# Altium PCB DE-211024.PcbDoc (part 2 of 2)
Units mil, origin at the board's own origin, x right, y up, seen from the top; angles counter-clockwise.
Board outline 2677.17 x 5821 mil, 2 copper layers (Top Layer, Bottom Layer); 98 components, 134 nets, 413 pads, 37 vias.
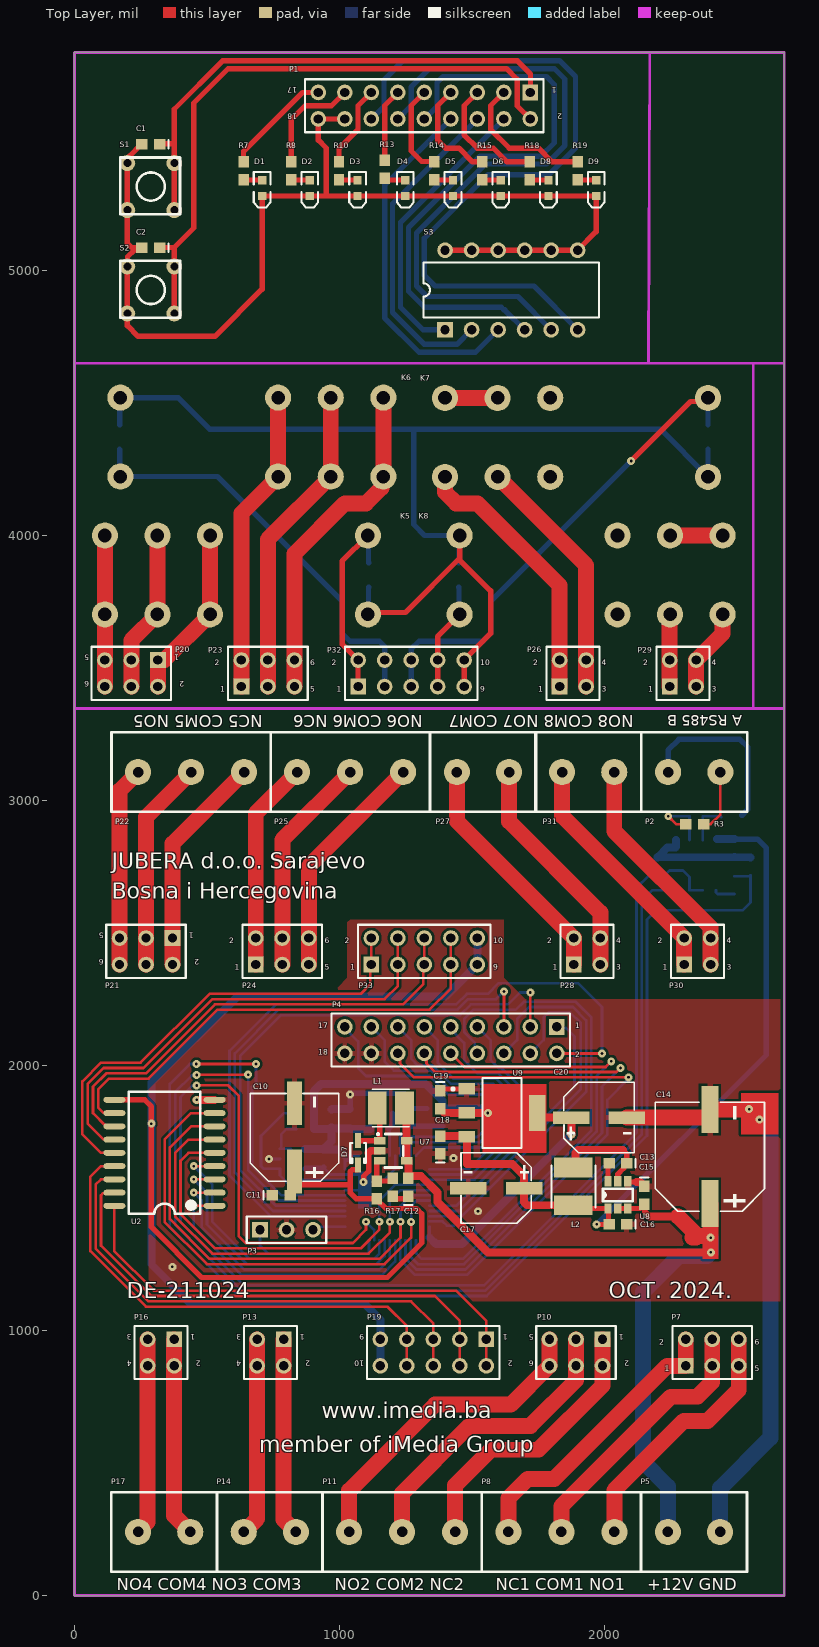
[diagram p0: Top Layer view]

## Via types
v1: diameter 30, hole 10, Top Layer to Bottom Layer, 37 vias

## Nets (pads, with @x,y where several pads share a name; then routed paths per layer and width w, separated by ;. In a path a pad name is that pad's centre, name@x,y a point inside that pad or via, vN(x,y) a via of type N, cw(c..) or ccw(c..) an arc to the next point about the centre after c; other vN are vias at no path point) (continued)
RELAY4: (continued)
  Bottom Layer w10: v1(450,1620) 520,1550 520,1410 660,1270 1130,1270 1150,1290 1150,1309.27 1150.13,1309.4 1150.13,1339.87 1150,1340 1150.47,1340.47 U1.32
RELAY5: U1.16 U2.5 | length 1497.9
  Top Layer w10: U2.5 430,1670 400,1640 400,1440 530,1310 1080,1310 1150,1380 v1(1150,1410)
  Bottom Layer w10: v1(1150,1410) 1150,1490 1209.21,1549.21 U1.16
RELAY6: U1.17 U2.6 | length 1596.3
  Top Layer w10: U2.6 430,1720 380,1670 380,1430 520,1290 1110,1290 1190,1370 v1(1190,1410)
  Bottom Layer w10: v1(1190,1410) 1190,1490 1229.53,1529.53 U1.17
RELAY7: U1.18 U2.7 | length 1683
  Top Layer w10: U2.7 440,1770 360,1690 360,1420 510,1270 1150,1270 1230,1350 v1(1230,1410)
  Bottom Layer w10: v1(1230,1410) 1230,1470 1269.84,1509.84 U1.18
RELAY8: U1.19 U2.8 | length 1775.9
  Top Layer w10: U2.8 440,1820 340,1720 340,1410 500,1250 1170,1250 1270,1350 1270,1409.46 v1(1270.35,1409.81)
  Bottom Layer w10: v1(1270.35,1409.81) 1270,1410.17 1270,1470 1290.16,1490.16 U1.19
SWCLK: P3.3 U1.37 | length 120.6
  Bottom Layer w10: P3.3@900,1391.73 U1.37
SWDIO: P3.1 U1.34 | length 530.5
  Bottom Layer w10: P3.1 700,1320 730,1290 1105,1290 1111.1,1296.1 U1.34
USART1_DE: R2.2 U1.33 U4.2 U4.3 | length 5197.3
  Top Layer w10: v1(461.21,1923.79) 462.43,1925 580,1925 620,1885 620,1355 645,1330 1050,1330 1100,1380 v1(1100,1410)
  Bottom Layer w10: v1(461.21,1923.79) 460.06,1922.63 442.63,1922.63 400,1880 400,1410 640,1170 1545,1170 2120,1745 2120,2670 2166.54,2716.54 R2.2 2226.54,2716.54 2245,2735 2295,2735 2320,2710 U4.3 U4.2 ; v1(1100,1410) 1130.44,1379.56 1130.44,1340.9 U1.33
USART1_RX: R5.1 R6.1 U1.43 | length 5236.5
  Top Layer w10: v1(460,2005) v1(685,2005)
  Bottom Layer w10: v1(460,2005) 435,2005 360,1930 360,1390 620,1130 1555,1130 2160,1735 2160,2550 2195,2585 2520,2585 2550,2615 R6.1 2546.93,2713.46 R5.1 ; v1(685,2005) 685,1934.17 670,1919.17 670,1620 780.16,1509.84 U1.43
USART1_TX: U1.42 U4.4 | length 4710
  Top Layer w10: v1(461.21,1963.79) 461.82,1964.39 654.39,1964.39 v1(655,1965)
  Bottom Layer w10: v1(461.21,1963.79) 460.06,1962.63 442.63,1962.63 380,1900 380,1400 630,1150 1550,1150 2140,1740 2140,2620 2181.02,2661.02 U4.4 ; v1(655,1965) 655,1605 769.84,1490.16 U1.42
pads on no net: K7.12 K7.22 K8.12 K8.22 U1.2 U1.3 U1.4 U1.5 U1.6 U1.35 U1.36 U1.38

## Polygon pours and split planes (outlines as drawn)
GND on Bottom Layer "GND_L02_P001" (solid, remove dead copper, pour order 1): 280,1910 610,2240 610,2250 950,2250 1030,2330 1030,2550 1620,2550 1620,2330 1700,2250 2670,2250 2670,1110 470,1110 280,1300
GND on Bottom Layer "GND_L02_P003" (solid, remove dead copper, pour order 3): 2170,3350 2170,2580 2520,2580 2520,1730 2530,1720 2540,1730 2680,1730 2680,3350
GND on Top Layer "GND_L01_P002" (solid, pour order 2): 2670,2250 1700,2250 1620,2330 1620,2550 1040,2550 1030,2540 1030,2330 950,2250 610,2250 610,2240 280,1910 280,1250 280,1110 2670,1110

## Keep-outs
Keep-Out Layer:
  lines w10: 0,3346.46 2677.17,3346.46 ; 0,4648.5 2677.17,4648.5 ; 2165.35,4652.06 2170,5820 ; 2560,4648.49 2560.32,3346.56 ; 0,0 0,5821 2677.17,5821 2677.17,0 0,0

## Other copper
Top Layer:
  rectangle net GND: 2515,1740 2655,1895
  rectangle net 3V3: 1540,1670 1780,1930
  rectangle net 12V: 2370,1270 2430,1460
  text "GREŠKA 3 kratka spojana PCB ADDRESS5,TIM3CH1 TIM3CH4" at 2847,1460 h60
Bottom Layer:
  rectangle net GND: 2515,1745 2655,1895
  rectangle net GND: 1070,1460 1120,1600

## Silkscreen, mask and mechanical layers (free items; w line width, h text height)
Top Overlay:
  text "NC5 COM5 NO5" at 710,3320 h45 r180
  text "NO6 COM6 NC6" at 1313.49,3320 h45 r180
  text "NO8 COM8 NO7 COM7" at 2110,3320 h45 r180
  text "A RS485 B" at 2520,3320 h40 r180
  text "JUBERA d.o.o. Sarajevo" at 140,2742 h60
  text "Bosna i Hercegovina" at 140,2628 h60
  text "DE-211024" at 198,1122 h60
  text "OCT. 2024." at 2016,1122 h60
  text "www.imedia.ba" at 932,668 h60
  text "member of iMedia Group" at 697,541 h60
  text "NO4 COM4 NO3 COM3" at 160,20 h45
  text "NO2 COM2 NC2" at 982.17,20 h45
  text "NC1 COM1 NO1" at 1590,20 h45
  text "+12V GND" at 2160,20 h45
Bottom Overlay:
  drawing of 6 lines, arcs and shapes, not listed
  text "220 V" at 850,2913 h70 r180
  text "HIGH VOLTAGE" at 1349,2833 h60 r180
  text "!!! WARNING !!!" at 1372,2645 h60 r180
  text "!!! WARNING !!!" at 1314,617 h60
  text "220 V" at 1837,433 h70
  text "HIGH VOLTAGE" at 1346,425 h60

## Text inside footprints (layer, text, board x,y; h text height)
P1: Top Overlay "18" at 840,5590 h20 r180; Top Overlay "17" at 840,5690 h20 r180; Top Overlay "1" at 1820,5690 h20 r180; Top Overlay "2" at 1840,5590 h20 r180
P4: Top Overlay "2" at 1890,2030 h20; Top Overlay "1" at 1890,2140 h20; Top Overlay "17" at 920,2140 h20; Top Overlay "18" at 920,2040 h20
P7: Top Overlay "1" at 2226,846.3 h20; Top Overlay "2" at 2206,946.3 h20; Top Overlay "5" at 2566,846.3 h20; Top Overlay "6" at 2566,946.3 h20
P10: Top Overlay "1" at 2072,986.3 h20 r180; Top Overlay "2" at 2092,886.3 h20 r180; Top Overlay "5" at 1732,986.3 h20 r180; Top Overlay "6" at 1732,886.3 h20 r180
P13: Top Overlay "3" at 629,986.3 h20 r180; Top Overlay "4" at 629,886.3 h20 r180; Top Overlay "2" at 889,886.3 h20 r180; Top Overlay "1" at 869,986.3 h20 r180
P16: Top Overlay "3" at 216,986.3 h20 r180; Top Overlay "4" at 216,886.3 h20 r180; Top Overlay "2" at 476,886.3 h20 r180; Top Overlay "1" at 456,986.3 h20 r180
P19: Top Overlay "2" at 1654,886.3 h20 r180; Top Overlay "1" at 1634,986.3 h20 r180; Top Overlay "9" at 1094,986.3 h20 r180; Top Overlay "10" at 1094,886.3 h20 r180
P20: Top Overlay "1" at 394.96,3549 h20 r180; Top Overlay "2" at 414.96,3449 h20 r180; Top Overlay "5" at 54.96,3549 h20 r180; Top Overlay "6" at 54.96,3449 h20 r180
P21: Top Overlay "1" at 450,2500.3 h20 r180; Top Overlay "2" at 470,2400.3 h20 r180; Top Overlay "5" at 110,2500.3 h20 r180; Top Overlay "6" at 110,2400.3 h20 r180
P23: Top Overlay "1" at 549.92,3409 h20; Top Overlay "2" at 529.92,3509 h20; Top Overlay "5" at 889.92,3409 h20; Top Overlay "6" at 889.92,3509 h20
P24: Top Overlay "1" at 604.07,2360.3 h20; Top Overlay "2" at 584.07,2460.3 h20; Top Overlay "5" at 944.07,2360.3 h20; Top Overlay "6" at 944.07,2460.3 h20
P26: Top Overlay "3" at 1990,3409 h20; Top Overlay "4" at 1990,3509 h20; Top Overlay "2" at 1730,3509 h20; Top Overlay "1" at 1750,3409 h20
P28: Top Overlay "3" at 2044,2360.3 h20; Top Overlay "4" at 2044,2460.3 h20; Top Overlay "2" at 1784,2460.3 h20; Top Overlay "1" at 1804,2360.3 h20
P29: Top Overlay "3" at 2405,3409 h20; Top Overlay "4" at 2405,3509 h20; Top Overlay "2" at 2145,3509 h20; Top Overlay "1" at 2165,3409 h20
P30: Top Overlay "3" at 2460,2360.3 h20; Top Overlay "4" at 2460,2460.3 h20; Top Overlay "2" at 2200,2460.3 h20; Top Overlay "1" at 2220,2360.3 h20
P32: Top Overlay "2" at 970,3509 h20; Top Overlay "1" at 990,3409 h20; Top Overlay "9" at 1530,3409 h20; Top Overlay "10" at 1530,3509 h20
P33: Top Overlay "2" at 1020,2460.3 h20; Top Overlay "1" at 1040,2360.3 h20; Top Overlay "9" at 1580,2360.3 h20; Top Overlay "10" at 1580,2460.3 h20